# EAGLE board CT_schematic (EAGLE 7.6.0)

Size 100 x 80 mm. Coordinates in mm from the lower left corner, seen from the top.
Outline: 0,0 100,0 100,80 0,80 0,0
Copper layers (1*16): Top 0.035mm / dielectric 1.5mm / Bottom 0.035mm
Design rules "default": minimum track width 10mil, minimum drill 24mil, track to track 8mil, track to pad 8mil, pad to pad 8mil, via to via 8mil, smd to smd 8mil, copper to edge 40mil, drill to drill 8mil, minimum pad ring 10mil, minimum via ring 8mil, stop-mask expansion 4mil, vias tented up to drill 0mil, thermal gap 10mil

## Footprints (pad centres in the part's own frame; a part is rotated, then mirrored left to right if it is on the bottom)
C0603 = smd 0.8 x 0.8: 1 -0.762,0; 2 0.762,0
C0402 = smd 0.5 x 0.5: 1 -0.508,0; 2 0.508,0
C1206 = smd 1.3 x 1.6: 1 -1.524,0; 2 1.524,0
C1210 = smd 1.2 x 2.5: 1 -1.524,0; 2 1.524,0
EXV-9H = smd 3.505 x 1.676: 1 -2.857,0; 2 2.857,0
L0603 = smd 0.8 x 0.8: 1 -0.762,0; 2 0.762,0
PJ-037B_PACKAGE = drill 3.7 square: 1 12,0 | drill 3.2 square: 2 6,0
R0603 = smd 0.8 x 0.8: 1 -0.762,0; 2 0.762,0
UFBGA132 = smd 0.32 x 0.32: A1 -2.75,2.75; A2 -2.25,2.75; A3 -1.75,2.75; A4 -1.25,2.75; A5 -0.75,2.75; A6 -0.25,2.75; A7 0.25,2.75; A8 0.75,2.75; A9 1.25,2.75; A10 1.75,2.75; A11 2.25,2.75; A12 2.75,2.75; B1 -2.75,2.25; B2 -2.25,2.25; B3 -1.75,2.25; B4 -1.25,2.25; B5 -0.75,2.25; B6 -0.25,2.25; B7 0.25,2.25; B8 0.75,2.25; B9 1.25,2.25; B10 1.75,2.25; B11 2.25,2.25; B12 2.75,2.25; C1 -2.75,1.75; C2 -2.25,1.75; C3 -1.75,1.75; C4 -1.25,1.75; C5 -0.75,1.75; C6 -0.25,1.75; C7 0.25,1.75; C8 0.75,1.75; C9 1.25,1.75; C10 1.75,1.75; C11 2.25,1.75; C12 2.75,1.75; D1 -2.75,1.25; D2 -2.25,1.25; D3 -1.75,1.25; D4 -1.25,1.25; D5 -0.75,1.25; D6 -0.25,1.25; D7 0.25,1.25; D8 0.75,1.25; D9 1.25,1.25; D10 1.75,1.25; D11 2.25,1.25; D12 2.75,1.25; E1 -2.75,0.75; E2 -2.25,0.75; E3 -1.75,0.75; E4 -1.25,0.75; E9 1.25,0.75; E10 1.75,0.75; E11 2.25,0.75; E12 2.75,0.75; F1 -2.75,0.25; F2 -2.25,0.25; F3 -1.75,0.25; F4 -1.25,0.25; F6 -0.25,0.25; F7 0.25,0.25; F9 1.25,0.25; F10 1.75,0.25; F11 2.25,0.25; F12 2.75,0.25; G1 -2.75,-0.25; G2 -2.25,-0.25; G3 -1.75,-0.25; G4 -1.25,-0.25; G6 -0.25,-0.25; G7 0.25,-0.25; G9 1.25,-0.25; G10 1.75,-0.25; G11 2.25,-0.25; G12 2.75,-0.25; H1 -2.75,-0.75; H2 -2.25,-0.75; H3 -1.75,-0.75; H4 -1.25,-0.75; H9 1.25,-0.75; H10 1.75,-0.75; H11 2.25,-0.75; H12 2.75,-0.75; J1 -2.75,-1.25; J2 -2.25,-1.25; J3 -1.75,-1.25; J4 -1.25,-1.25; J5 -0.75,-1.25; J6 -0.25,-1.25; J7 0.25,-1.25; J8 0.75,-1.25; J9 1.25,-1.25; J10 1.75,-1.25; J11 2.25,-1.25; J12 2.75,-1.25; K1 -2.75,-1.75; K2 -2.25,-1.75; K3 -1.75,-1.75; K4 -1.25,-1.75; K5 -0.75,-1.75; K6 -0.25,-1.75; K7 0.25,-1.75; K8 0.75,-1.75; K9 1.25,-1.75; K10 1.75,-1.75; K11 2.25,-1.75; K12 2.75,-1.75; L1 -2.75,-2.25; L2 -2.25,-2.25; L3 -1.75,-2.25; L4 -1.25,-2.25; L5 -0.75,-2.25; L6 -0.25,-2.25; L7 0.25,-2.25; L8 0.75,-2.25; L9 1.25,-2.25; L10 1.75,-2.25; L11 2.25,-2.25; L12 2.75,-2.25; M1 -2.75,-2.75; M2 -2.25,-2.75; M3 -1.75,-2.75; M4 -1.25,-2.75; M5 -0.75,-2.75; M6 -0.25,-2.75; M7 0.25,-2.75; M8 0.75,-2.75; M9 1.25,-2.75; M10 1.75,-2.75; M11 2.25,-2.75; M12 2.75,-2.75
TST-110-05-T-D-RA = drill 1 pad 1.7 square: 1 0,0 | drill 1 pad 1.7: 2 0,2.54; 3 2.54,0; 4 2.54,2.54; 5 5.08,0; 6 5.08,2.54; 7 7.62,0; 8 7.62,2.54; 9 10.16,0; 10 10.16,2.54; 11 12.7,0; 12 12.7,2.54; 13 15.24,0; 14 15.24,2.54; 15 17.78,0; 16 17.78,2.54; 17 20.32,0; 18 20.32,2.54; 19 22.86,0; 20 22.86,2.54
QFN65P400X400X100-17N = smd 1.016 x 0.356: 1 -1.803,0.965; 2 -1.803,0.33; 3 -1.803,-0.33; 4 -1.803,-0.965; 9 1.803,-0.965; 10 1.803,-0.33; 11 1.803,0.33; 12 1.803,0.965 | smd 0.356 x 1.016: 5 -0.965,-1.803; 6 -0.33,-1.803; 7 0.33,-1.803; 8 0.965,-1.803; 13 0.965,1.803; 14 0.33,1.803; 15 -0.33,1.803; 16 -0.965,1.803 | smd 2.108 x 2.108: 17 0,0
HTSS-105-01-G-D = drill 1 pad 1.8 square: 1 0,0 | drill 1 pad 1.8: 2 0,2.54; 3 2.54,0; 4 2.54,2.54; 5 5.08,0; 6 5.08,2.54; 7 7.62,0; 8 7.62,2.54; 9 10.16,0; 10 10.16,2.54
MICRO_USB_AB = smd 0.4 x 1.35: 1 1.3,0.26; 2 0.65,0.26; 3 0,0.26; 4 -0.65,0.26; 5 -1.3,0.26 | drill 0.6 pad 0.95 long: 6 4.175,-2.54; 7 -4.175,-2.54 | drill 0.7 pad 1.1 long: 8 -2.225,0.46; 9 2.225,0.46
SOT143B = smd 1 x 0.7: 1 -0.75,-1 | smd 0.6 x 0.7: 2 0.95,-1; 3 0.95,1; 4 -0.95,1
ABLS-25.000MHZ-B2F-T = smd 5.6 x 2.8: 1 -3.81,0; 2 5.69,0
ASEK = smd 1.4 x 1: 1 -1.1,-0.8; 2 1.1,-0.8; 3 1.1,0.8; 4 -1.1,0.8
WSON-8 = smd 0.3 x 0.6: 1 -0.75,0; 2 0.05,0; 3 0.85,0; 4 1.65,0; 5 1.65,3.8; 6 0.85,3.8; 7 0.05,3.8; 8 -0.75,3.8 | smd 3 x 2.6: PAD 0.45,1.9
SON-6 = smd 0.55 x 0.3: 1 -0.355,0.5 | smd 0.52 x 0.3: 2 -0.37,0; 3 -0.37,-0.5; 4 0.37,-0.5; 5 0.37,0; 6 0.37,0.5
SW_4-1437565-2 = smd 1.4 x 2.1: 1 -2.23,4.55; 2 -2.23,-4.55; 3 2.23,4.55; 4 2.23,-4.55
LGM67K-G1J2-24-Z = smd 0.8 x 1.4: A -2,0; C 0,0
NC7SZ125M5X = smd 1.3 x 0.7: 1 -1.3,0.95; 2 -1.3,0; 3 -1.3,-0.95; 4 1.3,-0.95; 5 1.3,0.95
DUMMY_PACKAGE_139 = drill 0.3: 1 0,-1; 2 1.5,-1

## Placement (x,y rotation side)
C1  1e-07  [C0603]  -33.02,59.69 0 top  (outside the outline)
C2  1e-07  [C0603]  -36.83,59.69 0 top  (outside the outline)
C3  1e-07  [C0603]  -40.64,59.69 0 top  (outside the outline)
C4  1e-07  [C0603]  -44.45,59.69 0 top  (outside the outline)
C5  1e-07  [C0603]  -48.26,59.69 0 top  (outside the outline)
C6  1e-07  [C0603]  -52.07,59.69 0 top  (outside the outline)
C7  1e-07  [C0603]  -55.88,59.69 0 top  (outside the outline)
C8  4.7e-06  [C0603]  -29.21,59.69 0 top  (outside the outline)
C9  1e-07  [C0603]  -59.69,59.69 0 top  (outside the outline)
C10  1e-08  [C0603]  -63.5,59.69 0 top  (outside the outline)
C11  1e-06  [C0603]  -67.31,59.69 0 top  (outside the outline)
C12  1e-11  [C0402]  -49.53,64.77 0 top  (outside the outline)
C13  1e-11  [C0402]  -53.34,64.77 0 top  (outside the outline)
C14  1e-07  [C0402]  -57.15,64.77 0 top  (outside the outline)
C15  1e-07  [C0402]  -60.96,64.77 0 top  (outside the outline)
C16  1e-07  [C0402]  -64.77,64.77 0 top  (outside the outline)
C17  1e-07  [C0402]  -68.58,64.77 0 top  (outside the outline)
C18  1e-06  [C0603]  -15.24,64.77 0 top  (outside the outline)
C19  1e-08  [C0402]  -15.24,69.85 0 top  (outside the outline)
C20  1e-08  [C0402]  -19.05,69.85 0 top  (outside the outline)
C21  1e-05  [C1206]  -55.88,46.99 0 top  (outside the outline)
C22  1e-05  [C1210]  -49.53,48.26 0 top  (outside the outline)
C23  1e-07  [C0402]  -22.86,69.85 0 top  (outside the outline)
C24  0.0001  [EXV-9H]  -38.1,40.64 0 top  (outside the outline)
C25  0.0001  [EXV-9H]  -49.53,40.64 0 top  (outside the outline)
C26  1e-08  [C0402]  -26.67,69.85 0 top  (outside the outline)
C27  1e-08  [C0402]  -30.48,69.85 0 top  (outside the outline)
F1  240.0  [L0603]  -19.05,64.77 0 top  (outside the outline)
J1  PJ-037B  [PJ-037B_PACKAGE]  -54.61,7.62 0 top  (outside the outline)
R2  1000.0  [R0603]  -22.86,64.77 0 top  (outside the outline)
R4  4700.0  [R0603]  -26.67,64.77 0 top  (outside the outline)
R6  2200.0  [R0603]  -30.48,64.77 0 top  (outside the outline)
R7  10000.0  [R0603]  -30.48,54.61 0 top  (outside the outline)
R8  10000.0  [R0603]  -35.56,54.61 0 top  (outside the outline)
R9  10000.0  [R0603]  -40.64,54.61 0 top  (outside the outline)
R10  10000.0  [R0603]  -45.72,54.61 0 top  (outside the outline)
R11  10000.0  [R0603]  -50.8,54.61 0 top  (outside the outline)
R12  10000.0  [R0603]  -55.88,54.61 0 top  (outside the outline)
R13  10000.0  [R0603]  -60.96,54.61 0 top  (outside the outline)
R14  10000.0  [R0603]  -66.04,54.61 0 top  (outside the outline)
R15  10000.0  [R0603]  -15.24,59.69 0 top  (outside the outline)
R16  47.0  [R0603]  -34.29,64.77 0 top  (outside the outline)
R17  100000.0  [R0603]  -15.24,54.61 0 top  (outside the outline)
R18  2231.0  [R0603]  -38.1,64.77 0 top  (outside the outline)
R19  1000.0  [R0603]  -41.91,64.77 0 top  (outside the outline)
R20  10000.0  [R0603]  -20.32,59.69 0 top  (outside the outline)
R21  10000.0  [R0603]  -25.4,59.69 0 top  (outside the outline)
R22  9100.0  [R0603]  -45.72,64.77 0 top  (outside the outline)
R23  680000.0  [R0603]  -20.32,54.61 0 top  (outside the outline)
R24  120000.0  [R0603]  -25.4,54.61 0 top  (outside the outline)
U1  STM32L152QEH6  [UFBGA132]  -44.45,21.59 0 top  (outside the outline)
U2  TST-110-05-T-D-RA  [TST-110-05-T-D-RA]  -67.31,29.21 0 top  (outside the outline)
U3  TSC2013QRSARQ1  [QFN65P400X400X100-17N]  -35.56,7.62 0 top  (outside the outline)
U4  HTSS-105-01-G-D  [HTSS-105-01-G-D]  -63.5,19.05 0 top  (outside the outline)
U5  47590-0001  [MICRO_USB_AB]  -63.5,7.62 0 top  (outside the outline)
U6  prtr5v0u2ax  [SOT143B]  -43.18,69.85 0 top  (outside the outline)
U7  ABLS-25.000MHZ-B2F-T  [ABLS-25.000MHZ-B2F-T]  -26.67,48.26 0 top  (outside the outline)
U8  ASEK-32.768KHz-ECST  [ASEK]  -29.21,40.64 0 top  (outside the outline)
U9  LP3878SDX-ADJ/NOPB  [WSON-8]  -30.48,30.48 0 top  (outside the outline)
U10  TPS3895ADRYR  [SON-6]  -50.8,68.58 0 top  (outside the outline)
U11  4-1437565-2  [SW_4-1437565-2]  -27.94,21.59 0 top  (outside the outline)
U12  Q65110A2395  [LGM67K-G1J2-24-Z]  -38.1,48.26 0 top  (outside the outline)
U13  nc7sz125m5x  [NC7SZ125M5X]  -60.96,46.99 0 top  (outside the outline)
U14  nc7sz125m5x  [NC7SZ125M5X]  -67.31,46.99 0 top  (outside the outline)
U15  Dummy  [DUMMY_PACKAGE_139]  -48.26,69.85 0 top  (outside the outline)

## Library data of the parts
C1-C27 F1 J1 R2 R4 R6-R24 U1-U15 = circuit_tree

## Nets
CLK_CRYSTAL_U1_F1: C12.1 U1.F1 U7.1
CLK_CRYSTAL_U1_G1: C13.1 U1.G1 U7.2
CLK_U1_D1: U1.D1 U8.3
GND: C1.2 C2.2 C3.2 C4.2 C5.2 C6.2 C7.2 C8.2 C9.2 C10.2 C11.2 C12.2 C13.2 C14.2 C15.2 C19.2 C20.2 C21.2 C22.2 C23.2 C24.2 C25.2 C26.2 C27.2 J1.2 R2.2 R7.2 R13.2 R19.2 R22.2 R24.2 U1.D3 U1.E3 U1.F2 U1.F6 U1.F7 U1.F11 U1.F12 U1.J1 U2.4 U2.6 U2.8 U2.10 U2.12 U2.14 U2.16 U2.18 U2.20 U3.17 U4.9 U5.5 U5.6 U5.7 U5.8 U5.9 U6.1 U8.2 U9.3 U9.PAD U10.2 U12.C U13.2 U13.3 U14.1 U14.3 U15.1
NET_U1_A4: R7.1 U1.A4
NET_U1_B3: R6.1 U1.B3 U3.1
NET_U1_E2: C9.1 U1.E2
NET_U1_H2: R4.1 U1.H2 U14.4
NET_U1_M1: C10.1 C11.1 F1.1 U1.L1 U1.M1
NET_U1_M11: U12.A
NET_U1_M12: U11.3 U11.4
NET_U2_19: R13.1 U2.19
NET_U3_4: R15.1 U3.4
NET_U3_5: R14.1 U3.5
NET_U3_9: C16.2 C17.2 C18.2 R16.2 U3.9
NET_U3_15: R16.1 U3.8 U3.15
NET_U4_3: U3.12 U4.3
NET_U4_4: U3.14 U4.4
NET_U4_5: U3.11 U4.5
NET_U4_6: U3.13 U4.6
NET_U6_4: U5.1 U6.4
NET_U9_1: C20.1 U9.1
NET_U9_6: R18.2 R19.1 U9.6
NET_U9_8: R17.1 U9.8
NET_U10_1: R21.1 R22.1 U10.1
NET_U10_3: R23.2 R24.1 U10.3
NET_U10_4: R20.1 U10.4 U13.4 U14.2
NET_U11_1: R2.1 U11.1 U11.2
PROC_DAC_OUT2: U1.K4 U15.2
PROC_SYS_JTCK_SWCLK: R11.1 U1.A10 U2.9
PROC_SYS_JTDI: R9.1 U1.A9 U2.5
PROC_SYS_JTDO_TRACESWO: U1.A8 U2.13
PROC_SYS_JTMS_SWDIO: R10.1 U1.A11 U2.7
PROC_SYS_JTRST: R8.1 U1.A7 U2.3
PROC_USB_DM: U1.B12 U5.2 U6.3
PROC_USB_DP: U1.A12 U5.3 U6.2
RST_OUT_U2_SRESET_B: R12.1 U2.15 U13.1
VCC_S1_7V4: C21.1 C24.1 C25.1 J1.1 R17.2 U9.4
VCC_TIER1_3V3: C1.1 C2.1 C3.1 C4.1 C5.1 C6.1 C7.1 C8.1 C14.1 C15.1 C16.1 C17.1 C18.1 C19.1 C22.1 C23.1 C26.1 C27.1 F1.2 R4.2 R6.2 R8.2 R9.2 R10.2 R11.2 R12.2 R14.2 R15.2 R18.1 R20.2 R21.2 R23.1 U1.C4 U1.G2 U1.G6 U1.G7 U1.G11 U1.G12 U1.H3 U2.1 U2.2 U3.7 U3.10 U8.4 U9.5 U10.6 U13.5 U14.5

## Tracks (layer width: path | path; a pad name or v marks a point on that pad's centre or on a via)
CLK_CRYSTAL_U1_F1  (2 unrouted)
CLK_CRYSTAL_U1_G1  (2 unrouted)
CLK_U1_D1  (1 unrouted)
GND  (65 unrouted)
NET_U1_A4  (1 unrouted)
NET_U1_B3  (2 unrouted)
NET_U1_E2  (1 unrouted)
NET_U1_H2  (2 unrouted)
NET_U1_M1  (4 unrouted)
NET_U1_M12  (1 unrouted)
NET_U2_19  (1 unrouted)
NET_U3_4  (1 unrouted)
NET_U3_5  (1 unrouted)
NET_U3_9  (4 unrouted)
NET_U3_15  (2 unrouted)
NET_U4_3  (1 unrouted)
NET_U4_4  (1 unrouted)
NET_U4_5  (1 unrouted)
NET_U4_6  (1 unrouted)
NET_U6_4  (1 unrouted)
NET_U9_1  (1 unrouted)
NET_U9_6  (2 unrouted)
NET_U9_8  (1 unrouted)
NET_U10_1  (2 unrouted)
NET_U10_3  (2 unrouted)
NET_U10_4  (3 unrouted)
NET_U11_1  (2 unrouted)
PROC_DAC_OUT2  (1 unrouted)
PROC_SYS_JTCK_SWCLK  (2 unrouted)
PROC_SYS_JTDI  (2 unrouted)
PROC_SYS_JTDO_TRACESWO  (1 unrouted)
PROC_SYS_JTMS_SWDIO  (2 unrouted)
PROC_SYS_JTRST  (2 unrouted)
PROC_USB_DM  (2 unrouted)
PROC_USB_DP  (2 unrouted)
RST_OUT_U2_SRESET_B  (2 unrouted)
VCC_S1_7V4  (5 unrouted)
VCC_TIER1_3V3  (47 unrouted)